# Altium PCB SWD_OD转接.PcbDoc
Units mil, origin at the board's own origin, x right, y up, seen from the top; angles counter-clockwise.
Board outline 6000 x 4000 mil, 2 copper layers (Top Layer, Bottom Layer); 9 components, 6 nets, 33 pads, 3 vias.
Unrouted connection lines stored in the file: 1.
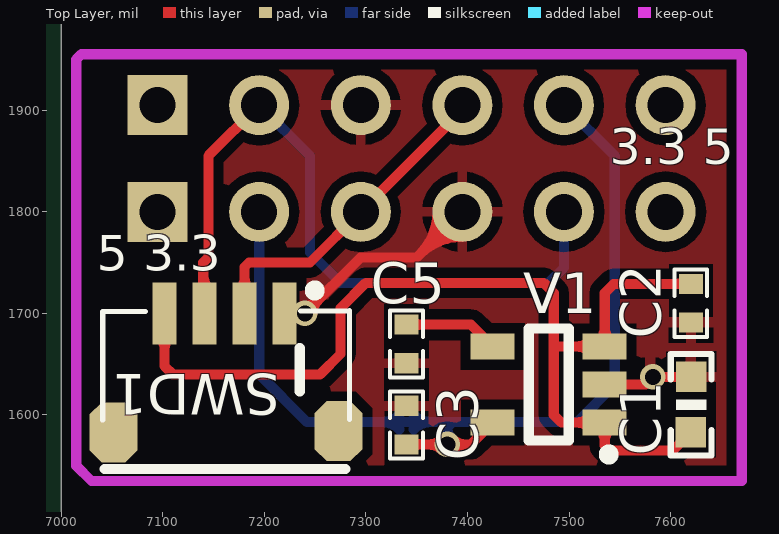
[diagram p0: Top Layer view]
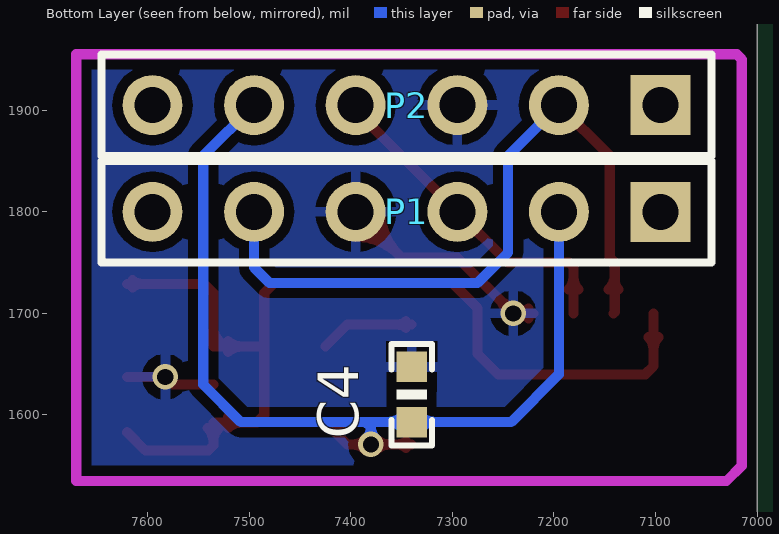
[diagram p1: Bottom Layer view, seen from below]

## Layer stack, top to bottom
Top Layer: signal copper 1.4
Dielectric: dielectric 12.6, FR-4, Dk 4.8
Bottom Layer: signal copper 1.4

## Board outline
1000,1000 7000,1000 7000,5000 1000,5000

## Design rules (kind name [scope] priority, off if disabled: settings)
Clearance [All] p1: gap=10
PolygonConnect [All] p1: connectstyle=Relief reliefconductorwidth=10 reliefentries=4 polygonreliefangle="90 Angle"
RoutingVias [All] p1: holewidth=28 width=50 viastyle="Through Hole" minholewidth=16 minwidth=25 maxholewidth=28 maxwidth=50
SilkscreenOverComponentPads [All] p1: minsilkscreentomaskgap=10
SolderMaskExpansion [All] p1: expansion=4
Width [All] p1: maxlimit=10 minlimit=10 preferedwidth=10
27 further rules are at their usual default settings.

## Components (designator, comment, footprint, x,y, rotation, side; value= is the part's Value field where it differs from the comment)
C1 "10uF" C0603 7620,1610 r90 top
C2 "0.1uF" "C 0402" 7620,1710 r90 top
C3 "0.1uF" "C 0402" 7340,1590 r90 top
C4 "10uF" C0603 7340,1620 r90 bottom
C5 "0.1uF" "C 0402" 7340,1670 r270 top
P1 "Header 6" HDR1X6 7095,1800 r0 bottom
P2 "Header 6" HDR1X6 7095,1905 r0 bottom
SWD1 "Header 4" "SH1.0-4P - up" 7220,1700 r180 top
V1 "RT9193-3.3/LP2985/SPX3819" SOT23-5 7480,1630 r0 top

## Footprints (in the part's own frame and the unit in brackets; to place one, negate y for a bottom-side part, rotate by r counter-clockwise, add the part's x,y. Pads: shape width x height; smd on the part's side, far side on the other; paste and mask are expansions set on the pad)
C0603 [mil]
  rect 30x30 smd: 1(-27,0) 2(27.5,-0.06)
  silkscreen extent -50,-20 50,20, body extent -31,-16 31,16, height 12
"C 0402" [mil]
  rect 20x23.62 smd: 1(-19,0) 2(19,0)
  silkscreen extent -33,-16 33,16, body extent -20,-10 20,10, height 20
HDR1X6 [mm] "Connector; Header; 6 Position"
  rect 1.5x1.5 hole 0.9: 1(0,0)
  round 1.5 hole 0.9: 2(2.54,0) 3(5.08,0) 4(7.62,0) 5(10.16,0) 6(12.7,0)
  silkscreen extent -1.27,-1.27 13.97,1.27
"SH1.0-4P - up" [mm]
  rect 0.6x1.55 smd: 1(0,0) 2(1,0) 3(2,0) 4(3,0)
  oct 1.2x1.5 smd: 1.(4.279,2.972) A(-1.346,2.946)
  silkscreen extent -1.63,-0.7 4.55,3.89
SOT23-5 [mm]
  rect 1.1x0.65 smd: 1(1.4,-0.95) 2(1.4,0) 3(1.4,0.95) 4(-1.4,0.95) 5(-1.4,-0.95)
  silkscreen extent -0.5,-1.87 1.63,1.4, body extent -1.28,-1.5 1.22,1.5, height 1.05

## Part data
C1 C3 C4: library part CAP, "Capacitor"
C2 C5: library part Capacitor, "普通电容"
P1 P2: "Header, 6-Pin"
SWD1: "Header, 4-Pin"
V1: "降压IC"

## Via types
v1: diameter 25, hole 16, Top Layer to Bottom Layer, 3 vias

## Nets (pads, with @x,y where several pads share a name; then routed paths per layer and width w, separated by ;. In a path a pad name is that pad's centre, name@x,y a point inside that pad or via, vN(x,y) a via of type N, cw(c..) or ccw(c..) an arc to the next point about the centre after c; other vN are vias at no path point)
3.3V: C3.1 C4.1 P1.2 P2.5 V1.5 | length 1341.9
  Top Layer w10: C3.1 v1(7380,1571) 7403.28,1571 V1.5 ; 7353.88,1571 cw(c7353.88,1583.07) 7345.35,1574.54 ccw(c7353.88,1583.07) 7353.88,1571 ; 7353.88,1571 ccw(c7353.88,1558.93) 7345.35,1567.46 cw(c7353.88,1558.93) 7353.88,1571 ; 7361.89,1571 cw(c7361.89,1552.89) 7374.7,1565.7 ccw(c7361.89,1552.89) 7361.89,1571 ; 7361.89,1571 ccw(c7361.89,1589.11) 7374.7,1576.3 cw(c7361.89,1589.11) 7361.89,1571 ; 7398.11,1571 cw(c7398.11,1589.11) 7385.3,1576.3 ccw(c7398.11,1589.11) 7398.11,1571 ; 7398.11,1571 ccw(c7398.11,1552.89) 7385.3,1565.7 cw(c7398.11,1552.89) 7398.11,1571 ; 7407.71,1575.43 ccw(c7400.09,1583.05) 7409.34,1588.59 cw(c7400.09,1583.05) 7407.71,1575.43
  Bottom Layer w10: P1.2 7195,1640 7242,1593 C4.1 7385,1593 ; v1(7380,1571) 7380,1588 ; P2.5 7545,1855 7545,1630 7508,1593 7385,1593 ; 7315.86,1593 cw(c7315.86,1568.86) 7332.93,1585.93 ccw(c7315.86,1568.86) 7315.86,1593 ; 7315.86,1593 ccw(c7315.86,1617.14) 7332.93,1600.07 cw(c7315.86,1617.14) 7315.86,1593 ; 7364.14,1593 cw(c7364.14,1617.14) 7347.07,1600.07 ccw(c7364.14,1617.14) 7364.14,1593 ; 7364.14,1593 ccw(c7364.14,1568.86) 7347.07,1585.93 cw(c7364.14,1568.86) 7364.14,1593 ; 7380,1588 cw(c7364.49,1588) 7374.94,1576.54 ccw(c7364.49,1588) 7380,1588 ; 7380,1588 ccw(c7395.51,1588) 7385.06,1576.54 cw(c7395.51,1588) 7380,1588 ; 7380,1588 7385,1593
5V: C1.1 C2.2 SWD1.4 V1.1 V1.3 | length 1311.5
  Top Layer w10: SWD1.4 7101.89,1648.11 7110,1640 7255,1640 7275,1660 7275,1705 7300,1730 7475,1730 7485,1720 7485,1600 7492.4,1592.6 V1.1 7535.12,1569.88 7540,1565 7602,1565 C1.1 ; 7487.4,1667.4 V1.3 7535.12,1720.12 7544,1729 C2.2 ; 7101.89,1664.86 cw(c7118.33,1664.86) 7106.71,1676.48 ccw(c7118.33,1664.86) 7101.89,1664.86 ; 7101.89,1664.86 ccw(c7085.45,1664.86) 7097.07,1676.48 cw(c7085.45,1664.86) 7101.89,1664.86 ; 7507.44,1592.6 cw(c7507.44,1573.78) 7520.75,1587.09 ccw(c7507.44,1573.78) 7507.44,1592.6 ; 7507.44,1592.6 ccw(c7507.44,1611.42) 7520.75,1598.11 cw(c7507.44,1611.42) 7507.44,1592.6 ; 7507.44,1667.4 cw(c7507.44,1648.58) 7520.75,1661.89 ccw(c7507.44,1648.58) 7507.44,1667.4 ; 7507.44,1667.4 ccw(c7507.44,1686.22) 7520.75,1672.91 cw(c7507.44,1686.22) 7507.44,1667.4 ; 7535.12,1573.78 cw(c7553.94,1573.78) 7540.63,1587.09 ccw(c7553.94,1573.78) 7535.12,1573.78 ; 7535.12,1573.78 ccw(c7516.3,1573.78) 7529.61,1587.09 cw(c7516.3,1573.78) 7535.12,1573.78 ; 7535.12,1686.22 cw(c7516.3,1686.22) 7529.61,1672.91 ccw(c7516.3,1686.22) 7535.12,1686.22 ; 7535.12,1686.22 ccw(c7553.94,1686.22) 7540.63,1672.91 cw(c7553.94,1686.22) 7535.12,1686.22 ; 7606.12,1729 cw(c7606.12,1716.93) 7614.65,1725.46 ccw(c7606.12,1716.93) 7606.12,1729 ; 7606.12,1729 ccw(c7606.12,1741.07) 7614.65,1732.54 cw(c7606.12,1741.07) 7606.12,1729
GND: C1.2 C2.1 C3.2 C4.2 C5.2 P1.4 P2.3 SWD1.1 V1.2 | length 535.3
  Top Layer w10: SWD1.1 v1(7240,1700) 7295,1755 7350,1755 P1.4 ; SWD1.1@7224.82,1695.18 cw(c7236.44,1683.56) 7236.44,1700 cw(c7236.44,1716.44) SWD1.1@7224.82,1704.82 ; v1@7234.7,1694.7 ccw(c7221.89,1681.89) 7221.89,1700 ccw(c7221.89,1718.11) v1@7234.7,1705.3 ; v1@7240,1707.5 ccw(c7240,1725.61) 7252.8,1712.8 ccw(c7265.61,1700) v1@7247.5,1700 ; P1.4@7370.47,1800 cw(c7311.26,1800) 7353.13,1758.13 cw(c7395,1716.26) P1.4@7395,1775.47 ; P1.4@7380.47,1800 cw(c7345.4,1800) 7370.2,1775.2 cw(c7395,1750.4) P1.4@7395,1785.47 ; V1.2 7575,1630 v1(7582.5,1637.5) C1.2
NetC5_1: C5.1 V1.4 | length 131.8
  Top Layer w10: C5.1 7403.28,1689 V1.4 ; 7353.88,1689 cw(c7353.88,1701.07) 7345.35,1692.54 ccw(c7353.88,1701.07) 7353.88,1689 ; 7353.88,1689 ccw(c7353.88,1676.93) 7345.35,1685.46 cw(c7353.88,1676.93) 7353.88,1689
SCLK_FC: P1.3 P2.4 SWD1.2 | length 380.6
  Top Layer w10: SWD1.2 7180.63,1745.63 7185,1750 7245,1750 P1.3 7395,1900 P2.4 ; 7180.63,1735.14 cw(c7164.19,1735.14) 7175.81,1723.52 ccw(c7164.19,1735.14) 7180.63,1735.14 ; 7180.63,1735.14 ccw(c7197.07,1735.14) 7185.45,1723.52 cw(c7197.07,1735.14) 7180.63,1735.14
SWD_FC: P1.5 P2.2 SWD1.3 | length 769.3
  Top Layer w10: SWD1.3 7140,1701.26 7140,1750 7145,1755 7145,1855 P2.2 ; SWD1.3@7136.44,1723.52 ccw(c7127.86,1732.1) 7140,1732.1 cw(c7127.86,1732.1) SWD1.3@7136.44,1723.52 ; 7140,1738.19 ccw(c7160.74,1738.19) 7146.08,1723.52 cw(c7160.74,1738.19) 7140,1738.19
  Bottom Layer w10: P2.2 7245,1855 7245,1760 7275,1730 7480,1730 7495,1745 P1.5
pads on no net: P1.1 P1.6 P2.1 P2.6 SWD1.1. SWD1.A

## Polygon pours and split planes (outlines as drawn)
GND on Top Layer "Top Layer-No Net" (solid, remove dead copper): 7000.47,1985.07 7005.47,1980.07 7005.47,1515.07 7675.47,1515.07 7700.47,1490.07 7730.47,1520.07 7730.47,2000.07
GND on Bottom Layer "Top Layer-No Net" (solid, remove dead copper): 6965,2018.74 6965,1533.74 6990,1508.74 7000,1518.74 7680,1518.74 7680,1988.74 7720,2028.74

## Keep-outs
Keep-Out Layer:
  lines w10: 7015,1550 7030,1535 7670,1535 7670,1955 7020,1955 7015,1950 7015,1550

## Silkscreen, mask and mechanical layers (free items; w line width, h text height)
Top Overlay:
  text "3.3 5" at 7540,1835 h60
  text "5 3.3" at 7035,1730 h60